# EAGLE board M0_v1.0 (EAGLE 9.6.2)
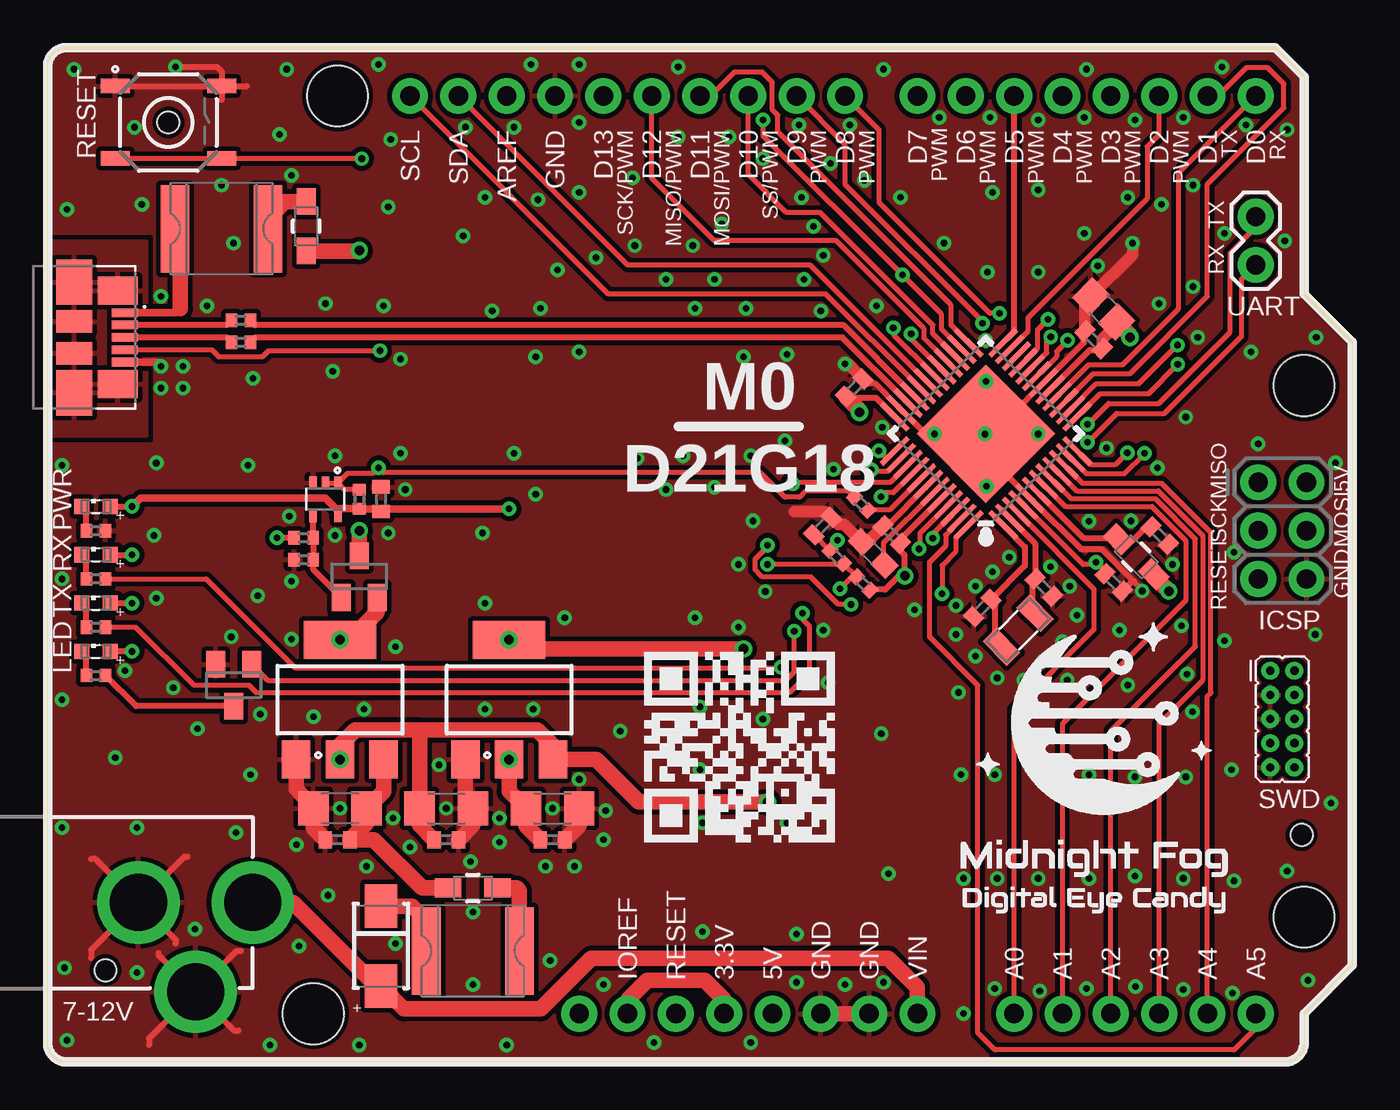
[diagram p0: board, top side]
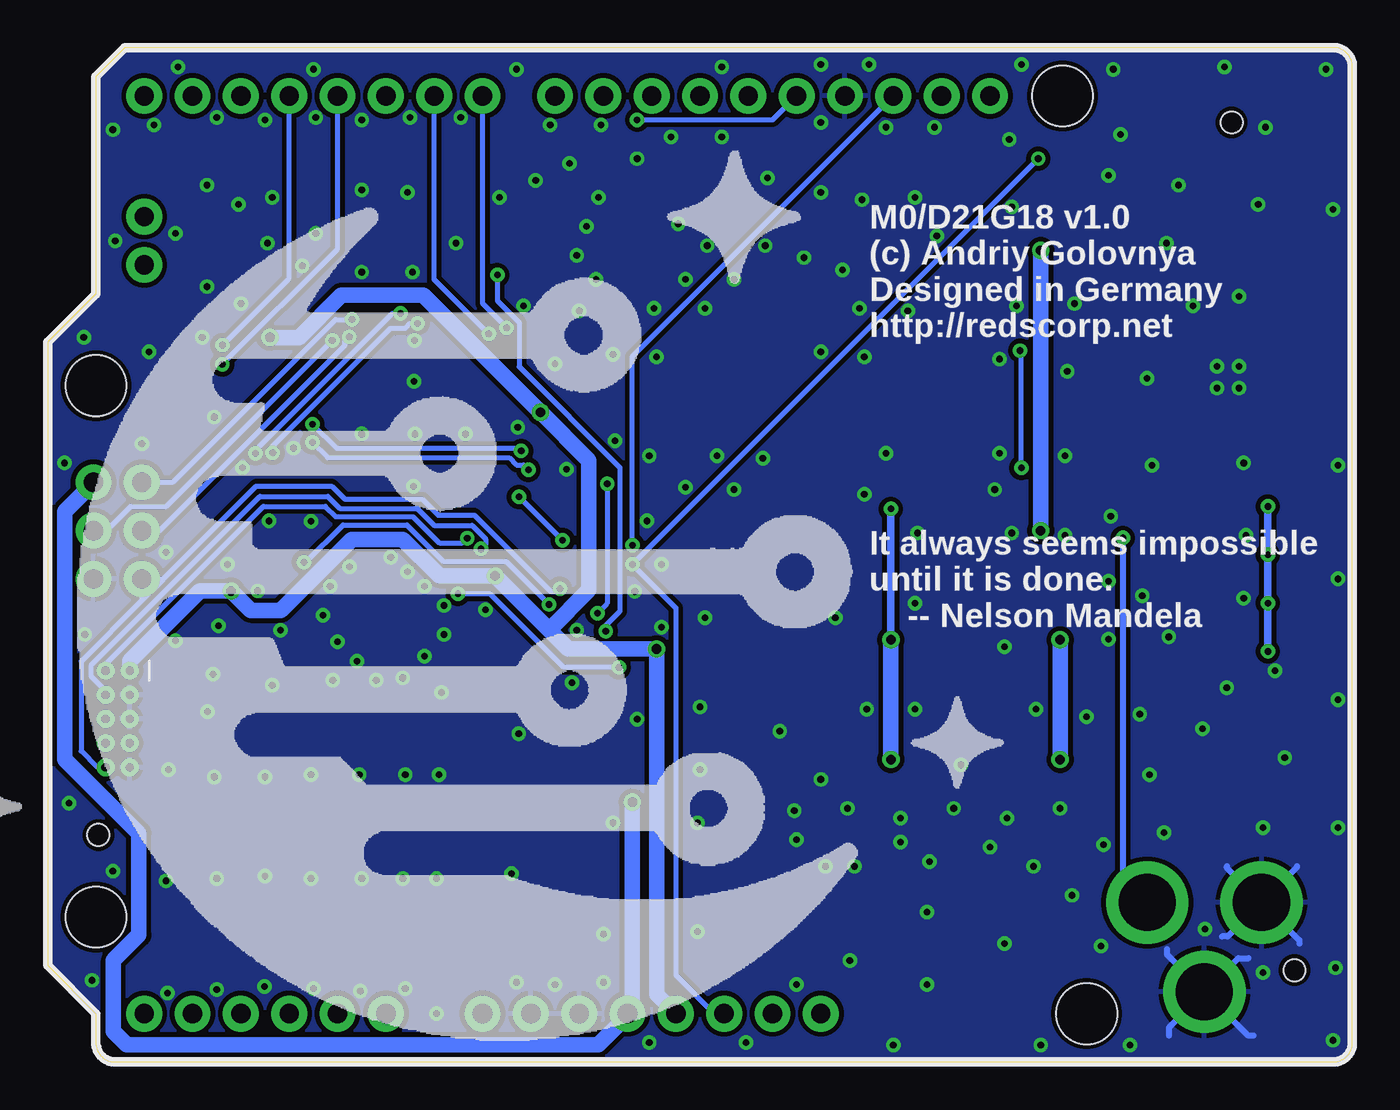
[diagram p1: board, bottom side, seen from below]

Size 68.58 x 53.34 mm. Coordinates in mm from the lower left corner, seen from the top.
Outline: 64.52,53.34 66.04,51.82 66.04,40.39 68.58,37.85 68.58,5.08 66.04,2.54 66.04,1 arc-90 65.04,0 1,0 arc-90 0,1 0,52.34 arc-90 1,53.34 64.52,53.34
Copper layers (1*16): Top 0.035mm / dielectric 1.5mm / Bottom 0.035mm
Design rules "default *": minimum track width 6mil, minimum drill 0.35mm, track to track 6mil, track to pad 6mil, pad to pad 6mil, via to via 6mil, smd to smd 6mil, copper to edge 10mil, drill to drill 6mil, minimum pad ring 10mil, minimum via ring 8mil, stop-mask expansion 4mil, vias tented up to drill 20mil, thermal gap 10mil
Net classes: 1 XUSB: width 0.305 mm; 2 USB: width 0.305 mm; 3 POWER: width 0.305 mm
Holes 3.2 mm at 13.97,2.54 15.24,50.8 66.04,7.62 66.04,35.56

## Footprints (pad centres in the part's own frame; a part is rotated, then mirrored left to right if it is on the bottom)
C1206 = smd 1.6 x 1.8: 1 -1.4,0; 2 1.4,0
C0402 = smd 0.7 x 0.9: 1 -0.65,0; 2 0.65,0
C0603 = smd 1.1 x 1: 1 -0.85,0; 2 0.85,0
C0805 = smd 1.3 x 1.5: 1 -0.95,0; 2 0.95,0
POWER_JACK_PTH = drill 2.997 pad 4.318: GND 0,7.7; GNDBREAK 4.7,10.7; PWR 0,13.7
MOLEX_47346-0001 = smd 0.45 x 1.38: 1 -1.3,2.66; 2 -0.65,2.66; 3 0,2.66; 4 0.65,2.66; 5 1.3,2.66 | smd 1.475 x 2.1: SH1 -2.462,2.3; SH2 2.462,2.3 | smd 2.375 x 1.9: SH3 -2.913,0; SH6 2.913,0 | smd 1.175 x 1.9: SH4 -0.838,0; SH5 0.838,0
1X10_NO_SILK = drill 1.016 pad 1.88: 1 0,0; 2 2.54,0; 3 5.08,0; 4 7.62,0; 5 10.16,0; 6 12.7,0; 7 15.24,0; 8 17.78,0; 9 20.32,0; 10 22.86,0
1X08_NO_SILK = drill 1.016 pad 1.88: 1 0,0; 2 2.54,0; 3 5.08,0; 4 7.62,0; 5 10.16,0; 6 12.7,0; 7 15.24,0; 8 17.78,0
2X3-NS = drill 1.016 pad 1.88: 1 -2.54,-1.27; 2 -2.54,1.27; 3 0,-1.27; 4 0,1.27; 5 2.54,-1.27; 6 2.54,1.27
1X06_NO_SILK = drill 1.016 pad 1.88: 1 0,0; 2 2.54,0; 3 5.08,0; 4 7.62,0; 5 10.16,0; 6 12.7,0
2X5_PTH_SILK_.05 = drill 0.432: 1 0,0; 2 0,1.27; 3 1.27,0; 4 1.27,1.27; 5 2.54,0; 6 2.54,1.27; 7 3.81,0; 8 3.81,1.27; 9 5.08,0; 10 5.08,1.27
1X02 = drill 1.016 pad 1.88: 1 0,0; 2 2.54,0
WE-TVSP_DO-214AC_UNIDIRECTIONAL = smd 2.3 x 1.7: 1 -2.1,0; 2 2.1,0
MF-SMDF050 = smd 1.5 x 4.6: 1 -2.45,0; 2 2.45,0
TOOLING-HOLE = hole 1.153: 0,0
SOT223 = smd 1.5 x 2: 1 -2.3,-3.15; 2 0,-3.15; 3 2.3,-3.15 | smd 3.8 x 2: 4 0,3.15
SC70-5 = smd 0.4 x 0.7: 1 -0.65,-0.85; 2 0,-0.85; 3 0.65,-0.85; 4 0.65,0.85; 5 -0.65,0.85
WE-CBA_0805(W=4) = smd 1.4 x 1: 1 -1.3,0; 2 1.3,0
SML0603 = smd 0.8 x 0.8: A 0.75,0; C -0.75,0
3.2X1.5 = smd 1 x 1.8: 1 -1.25,0; 2 1.25,0
R0402 = smd 0.6 x 0.7: 1 -0.5,0; 2 0.5,0
TACTILE_SWITCH_SMD_5.2MM = smd 1.524 x 0.762: 1 -2.794,1.905; 2 2.794,1.905; 3 -2.794,-1.905; 4 2.794,-1.905
SOT23 = smd 1 x 1.4: 1 -0.95,-1.1; 2 0.95,-1.1; 3 0,1.1
TQFP-48 = smd 1.5 x 0.28: 1 -4.25,2.75; 2 -4.25,2.25; 3 -4.25,1.75; 4 -4.25,1.25; 5 -4.25,0.75; 6 -4.25,0.25; 7 -4.25,-0.25; 8 -4.25,-0.75; 9 -4.25,-1.25; 10 -4.25,-1.75; 11 -4.25,-2.25; 12 -4.25,-2.75; 25 4.25,-2.75; 26 4.25,-2.25; 27 4.25,-1.75; 28 4.25,-1.25; 29 4.25,-0.75; 30 4.25,-0.25; 31 4.25,0.25; 32 4.25,0.75; 33 4.25,1.25; 34 4.25,1.75; 35 4.25,2.25; 36 4.25,2.75 | smd 0.28 x 1.5: 13 -2.75,-4.25; 14 -2.25,-4.25; 15 -1.75,-4.25; 16 -1.25,-4.25; 17 -0.75,-4.25; 18 -0.25,-4.25; 19 0.25,-4.25; 20 0.75,-4.25; 21 1.25,-4.25; 22 1.75,-4.25; 23 2.25,-4.25; 24 2.75,-4.25; 37 2.75,4.25; 38 2.25,4.25; 39 1.75,4.25; 40 1.25,4.25; 41 0.75,4.25; 42 0.25,4.25; 43 -0.25,4.25; 44 -0.75,4.25; 45 -1.25,4.25; 46 -1.75,4.25; 47 -2.25,4.25; 48 -2.75,4.25
QFN-48 = smd 0.7 x 0.25: 1 -3.4,2.75; 2 -3.4,2.25; 3 -3.4,1.75; 4 -3.4,1.25; 5 -3.4,0.75; 6 -3.4,0.25; 7 -3.4,-0.25; 8 -3.4,-0.75; 9 -3.4,-1.25; 10 -3.4,-1.75; 11 -3.4,-2.25; 12 -3.4,-2.75; 25 3.4,-2.75; 26 3.4,-2.25; 27 3.4,-1.75; 28 3.4,-1.25; 29 3.4,-0.75; 30 3.4,-0.25; 31 3.4,0.25; 32 3.4,0.75; 33 3.4,1.25; 34 3.4,1.75; 35 3.4,2.25; 36 3.4,2.75 | smd 0.25 x 0.7: 13 -2.75,-3.4; 14 -2.25,-3.4; 15 -1.75,-3.4; 16 -1.25,-3.4; 17 -0.75,-3.4; 18 -0.25,-3.4; 19 0.25,-3.4; 20 0.75,-3.4; 21 1.25,-3.4; 22 1.75,-3.4; 23 2.25,-3.4; 24 2.75,-3.4; 37 2.75,3.4; 38 2.25,3.4; 39 1.75,3.4; 40 1.25,3.4; 41 0.75,3.4; 42 0.25,3.4; 43 -0.25,3.4; 44 -0.75,3.4; 45 -1.25,3.4; 46 -1.75,3.4; 47 -2.25,3.4; 48 -2.75,3.4 | smd 5.15 x 5.15: EP 0,0

## Placement (x,y rotation side)
C1  47uF  [C1206]  15.37,13.34 180 top
C2  47uF  [C1206]  20.95,13.34 0 top
C3  47uF  [C1206]  26.54,13.34 0 top
C4  100nF  [C0402]  15.24,11.68 180 top
C5  100nF  [C0402]  20.95,11.68 0 top
C6  100nF  [C0402]  26.54,11.68 0 top
C7  1uF  [C0603]  43.39,26.75 135 top
C8  10nF  [C0402]  40.73,28.17 45 top
C9  100nF  [C0402]  58.46,27.68 315 top
C11  100nF  [C0402]  17.53,29.59 90 top
C12  12pF  [C0402]  49.14,23.87 45 top
C13  12pF  [C0402]  52.37,24.95 135 top
C14  100nF  [C0402]  42.4,35.46 45 top
C15  100nF  [C0402]  54.97,37.97 135 top
C16  100nF  [C0402]  44.38,27.73 135 top
C17  10uF  [C0805]  55.5,39.59 135 top
C19  100nF  [C0402]  56.04,25.22 315 top
CN1  POWER_JACK  [POWER_JACK_PTH]  -2.92,8.38 270 top
CN2  47346-0001  [MOLEX_47346-0001]  1.4,38.1 270 top
CN3  DIGITAL10  [1X10_NO_SILK]  19.05,50.8 0 top
CN4  DIGITAL8  [1X08_NO_SILK]  45.72,50.8 0 top
CN5  ICSP  [2X3-NS]  64.9,27.94 270 top
CN6  POWER8  [1X08_NO_SILK]  45.72,2.54 180 top
CN7  ANALOG6  [1X06_NO_SILK]  63.5,2.54 180 top
CN8  SWD  [2X5_PTH_SILK_.05]  64.26,20.57 270 top
CN9  UART  [1X02]  63.5,44.45 270 top
D1  M7  [WE-TVSP_DO-214AC_UNIDIRECTIONAL]  17.53,6.1 270 top
F1  1812L050/30PR  [MF-SMDF050]  22.35,5.84 0 top
F2  1812L050/30PR  [MF-SMDF050]  9.14,43.81 0 top
HOLE1  TOOLINGHOLE  [TOOLING-HOLE]  6.35,49.4 0 top
HOLE2  TOOLINGHOLE  [TOOLING-HOLE]  3.05,4.83 0 top
HOLE3  TOOLINGHOLE  [TOOLING-HOLE]  65.91,11.94 0 top
IC1  AMS1117-5.0  [SOT223]  15.37,19.05 0 top
IC2  AMS1117-3.3  [SOT223]  24.26,19.05 0 top
IC3  74LVC1G125DCK  [SC70-5]  14.61,29.59 180 top
L1  GZ2012D601TF  [WE-CBA_0805(W=4)]  22.35,9.14 180 top
L2  GZ2012D601TF  [WE-CBA_0805(W=4)]  13.59,43.94 270 top
L3  GZ2012D601TF  [WE-CBA_0805(W=4)]  57.22,26.57 315 top
LED1  GREEN  [SML0603]  2.54,29.21 0 top
LED2  BLUE  [SML0603]  2.54,26.67 0 top
LED3  BLUE  [SML0603]  2.54,24.13 0 top
LED4  YELLOW  [SML0603]  2.54,21.59 0 top
LOGO1  MFDECLOGO_SQ_10MM  [MFDEC_SQ_10MM]  46.99,7.37 0 top
LOGO2  MFDECLOGO_L_40MM  [MFDEC_L_40MM]  78.74,-2.54 0 bottom  (outside the outline)
LOGO3  RSNURL_QR_10MM  [RSNURL_QR_10MM]  31.37,11.56 0 top
Q2  32.768KHz  [3.2X1.5]  51.02,22.7 225 top
R1  22R  [R0402]  10.16,38.99 0 top
R2  22R  [R0402]  10.16,37.85 0 top
R3  330R  [R0402]  41.47,26.55 315 top
R4  100K  [R0402]  13.46,27.56 180 top
R5  47K  [R0402]  13.46,26.42 0 top
R6  330R  [R0402]  42.76,29.35 315 top
R7  470R  [R0402]  2.54,27.94 180 top
R8  470R  [R0402]  2.54,25.4 180 top
R9  470R  [R0402]  2.54,22.86 180 top
R10  470R  [R0402]  2.54,20.32 180 top
R11  100K  [R0402]  16.38,29.59 270 top
R12  10K  [R0402]  42.87,25.15 315 top
S1  RESET  [TACTILE_SWITCH_SMD_5.2MM]  6.35,49.4 0 top
T1  AO3401A  [SOT23]  16.38,25.53 0 top
T2  2N7002  [SOT23]  9.78,19.81 180 top
U1  ATSAMD21G18A-AU  [TQFP-48]  49.31,33.03 135 top
U2  ATSAMD21G18A-MU  [QFN-48]  49.31,33.03 135 top

## Library data of the parts
C1-C9 C11-C17 C19 = rcl; SPICEPREFIX: C
CN1 = SparkFun-Connectors; PROD_ID: CONN-08197
CN2 = SnapEDA-Library; MANUFACTURER: Molex
CN3 CN5 CN8 CN9 = SparkFun-Connectors
CN4 CN6 = SparkFun-Connectors; PROD_ID: CONN-08438
CN7 = SparkFun-Connectors; PROD_ID: CONN-08437
D1 = Wurth_EMC Components_WE-TVSP; DATASHEET-URL: -; IPEAK: 1.0A; MOUNT: SMT; PART-NUMBER: 824500252; PDISS: 400W; VBR: 294V; VCLAMP: 405V
F1 F2 = fuse
HOLE1-HOLE3 = _my_fiducia
IC1 IC2 = v-reg
IC3 = 74xx-little-us; SPICEPREFIX: J
L1-L3 = Wurth_Automotive_WE-CBA; DATASHEET-URL: https://www.we-online.com/catalog/datasheet/782853102.pdf; IR1: 1000mA; MOUNT: SMT; PART-NUMBER: 782853102; RDC-MAX: 0.3Ohm; TYPE: High Current; ZMAX: 1000Ohm
LED1-LED4 = led
LOGO1-LOGO3 = _my_logos
Q2 = crystal-geyer_V1_0
R1-R12 = rcl; SPICEPREFIX: R
S1 = SparkFun-Switches; PROD_ID: SWCH-08247; SF_SKU: COM-08720
T1 = Transistor; CATEGORY: Transistor; SUB-CATEGORY: MOSFET; TYPE: P-Channel
T2 = Transistor; CATEGORY: Transistor; SUB-CATEGORY: MOSFET; TYPE: N-Channel
U1 U2 = SparkFun-IC-Microcontroller; PROD_ID: IC-13064

## Nets
3.3V [POWER]: C3.1 C6.1 C11.1 C14.1 C15.1 C16.1 C17.1 CN6.5 CN6.7 CN8.1 IC2.4 IC3.5 L3.2 LED1.A LED2.A LED3.A LED4.A R11.2 R12.2 U1.17 U1.36 U1.44 U2.17 U2.36 U2.44
5V [POWER]: C2.1 C5.1 CN5.2 CN6.4 IC1.4 IC2.3 T1.2
A0: CN7.6 U1.3 U2.3
A1: CN7.5 U1.7 U2.7
A2: CN7.4 U1.8 U2.8
A3: CN7.3 U1.9 U2.9
A4: CN7.2 U1.10 U2.10
A5: CN7.1 U1.47 U2.47
AREF: C19.1 CN3.3 U1.4 U2.4
D0_RX: CN4.8 U1.16 U2.16
D1_TX: CN4.7 U1.15 U2.15
D2: CN4.6 U1.23 U2.23
D3_PWM: CN4.5 U1.14 U2.14
D4: CN4.4 U1.13 U2.13
D5_PWM: CN4.3 U1.24 U2.24
D6_PWM: CN4.2 U1.29 U2.29
D7: CN4.1 U1.30 U2.30
D8: CN3.10 U1.11 U2.11
D9_PWM: CN3.9 U1.12 U2.12
D10_SS: CN3.8 U1.27 U2.27
D11_MOSI: CN3.7 U1.25 U2.25
D12_MISO: CN3.6 U1.28 U2.28
D13_SCK: CN3.5 T2.1 U1.26 U2.26
GND [POWER]: C1.2 C2.2 C3.2 C4.2 C5.2 C6.2 C7.2 C8.2 C9.2 C11.2 C12.1 C13.1 C14.2 C15.2 C16.2 C17.2 C19.2 CN1.GND CN1.GNDBREAK CN2.5 CN3.4 CN5.6 CN6.2 CN6.3 CN8.3 CN8.5 CN8.9 IC1.1 IC2.1 IC3.3 R5.1 R7.1 S1.1 T2.2 U1.5 U1.18 U1.35 U1.42 U2.5 U2.18 U2.35 U2.42
MCU_OSC32_IN: C12.2 Q2.2 U1.1 U2.1
MCU_OSC32_OUT: C13.2 Q2.1 U1.2 U2.2
MCU_RESET: C8.1 R3.1 U1.40 U2.40
N$2: D1.1 F1.1
N$3: F1.2 L1.1
N$4: F2.2 L2.1
N$7: LED1.C R7.2
N$9: LED3.C R9.2
N$10: LED2.C R8.2
N$11: LED4.C R10.2
N$12: IC3.4 R4.1 R5.2 T1.1
N$13: R10.1 T2.3
N$14: C1.1 C4.1 IC1.3 L1.2
RESET: CN5.5 CN6.6 CN8.10 R3.2 R12.1 S1.3
RX_LED: R8.1 U1.48 U2.48
SCL: CN3.1 U1.32 U2.32
SDA: CN3.2 U1.31 U2.31
SPI_MISO: CN5.1 U1.21 U2.21
SPI_MOSI: CN5.4 U1.19 U2.19
SPI_SCK: CN5.3 U1.20 U2.20
SWDCLK: CN8.4 U1.45 U2.45
SWDIO: CN8.2 U1.46 U2.46
TX_LED: R9.1 U1.39 U2.39
UART_RX: CN9.2 U1.38 U2.38
UART_TX: CN9.1 U1.37 U2.37
USB_D_M [USB]: R1.2 U1.33 U2.33
USB_D_P [USB]: R2.2 U1.34 U2.34
USB_EN: R6.2 U1.41 U2.41
USB_SHIELD: CN2.SH1 CN2.SH2 CN2.SH3 CN2.SH4 CN2.SH5 CN2.SH6
VDDANA: C9.1 L3.1 U1.6 U2.6
VDDCORE: C7.1 U1.43 U2.43
VIN [POWER]: CN1.PWR CN6.1 D1.2 R4.2
VUSB [POWER]: L2.2 T1.3
XUSB [POWER]: CN2.1 F2.1
XUSB_D_M [XUSB]: CN2.2 R1.1
XUSB_D_P [XUSB]: CN2.3 R2.1
XUSB_EN: CN2.4 IC3.1 IC3.2 R6.1 R11.1

## Tracks (layer width: path | path; a pad name or v marks a point on that pad's centre or on a via)
3.3V  (via drill 0.35, 0.5)
  Top 0.305: LED1.A v4.45,29.21 | v4.45,21.59 LED4.A | LED3.A v4.45,24.13 | LED2.A v4.45,26.67 | C15.1 55.35,37.43 54.78,37.43 U1.17 U2.17 | C14.1 42.02,34.92 43.54,34.92 | 44.9,25.72 45.04,25.86 45.04,26.67 44.84,26.87 C16.1 44.84,27.49 U1.44 U2.44 | 44.9,25.72 44.02,24.84 43.27,24.84 R12.2 | v45.06,25.56 44.9,25.72 | 44.9,25.72 | U2.36 U1.36 43.54,34.92 | 43.54,34.92
  Top 0.406: v4.45,29.21 4.88,29.65 14.6,29.65 15.26,29 | v24.26,29.08 24.24,29.07 17.65,29.07 C11.1 17.4,29.07 16.41,29.07 R11.2 15.35,29.09 15.26,29 | 15.26,29 IC3.5
  Top 0.61: C15.1 55.43,38.02 56.18,38.76 C17.1
  Top 0.813: v36.58,21.72 24.74,21.72 IC2.4 | v24.26,15.91 24.26,14.22 C3.1 25.14,12.43 C6.1 | CN6.5 35.56,3.26 34.53,4.29 31.51,4.29 30.48,3.26 CN6.7 | v58.93,24.77 58.14,25.56 L3.2 | C14.1 42.67,34.27 v42.67,34.16 | C17.1 56.9,38.2 v56.9,38.1
  Bottom 0.406: v4.45,29.21 v4.45,26.67 v4.45,24.13 v4.45,21.59 | IC2.4 v24.26,29.08
  Bottom 0.813: IC2.4 v24.26,15.91 | CN6.5 36.58,3.56 v36.58,21.72 41.22,21.72 42.23,22.73 | CN8.1 64.26,21.08 60.58,24.77 v58.93,24.77 57.91,23.75 56.32,23.75 52.59,27.48 49.9,27.48 47.98,25.56 v45.06,25.56 42.23,22.73 | 42.23,22.73 40.13,24.82 40.13,31.62 v42.67,34.16 v42.68,34.16 48.82,40.31 53.15,40.31 55.36,38.1 v56.9,38.1
  other vias: 24.26,22.2
5V  (via drill 0.5)
  Top 0.305: IC1.4 14.73,22.2 13.97,22.96
  Top 0.813: T1.2 17.33,23.66 15.87,22.2 IC1.4 | 19.55,17.46 C2.1 19.55,12.43 C5.1 | 19.55,17.46 25.75,17.46 26.56,16.65 IC2.3 28.84,15.9 31.08,13.66 v37.85,13.66 | 19.55,17.46 16.18,17.46 15.37,16.65 v15.37,15.91
  Bottom 0.813: IC1.4 v15.37,15.91 | v37.85,13.66 37.85,2.79 CN6.4 38.1,2.45 39.64,0.91 64.41,0.91 65.13,1.63 65.13,5.34 63.78,6.68 63.78,12.03 67.67,15.92 67.67,28.94 66.17,30.44 CN5.2
  other vias: 15.37,22.2
A0
  Top 0.254: CN7.6 50.8,18.54 54.99,22.73 54.99,24.88 U1.3 U2.3 | U2.3
A1
  Top 0.254: CN7.5 53.34,17.78 59.82,24.26 59.82,27.43 58.04,29.21 53.49,29.21 U1.7 U2.7
A2
  Top 0.254: CN7.4 55.88,17.4 60.33,21.84 60.33,27.5 58.21,29.62 53.79,29.62 U1.8 U2.8
A3
  Top 0.254: CN7.3 58.42,17.78 60.73,20.09 60.73,27.67 58.38,30.02 54.09,30.02 U1.9 U2.9
A4
  Top 0.254: CN7.2 60.96,19.24 61.14,19.41 61.14,27.84 58.54,30.43 54.39,30.43 U1.10 U2.10 | U2.10
A5
  Top 0.254: CN7.1 63.5,1.78 62.36,0.64 49.78,0.64 48.9,1.52 48.9,19.81 46.35,22.35 46.35,26.29 47.19,27.13 47.19,27.71 47.9,28.42 U1.47 U2.47
AREF  (via drill 0.35)
  Top 0.254: v42.22,24.06 41.56,24.06 40.11,25.5 37.57,25.5 37.19,25.89 37.19,26.43 37.85,27.09 v37.85,27.18 | U2.4 U1.4 54.42,26.15 54.98,26.15 v55.11,26.28 55.58,25.81 C19.1
  Bottom 0.254: v42.22,24.06 44.48,26.32 47.77,26.32 49.7,28.24 53.05,28.24 55.01,26.28 v55.11,26.28 | v37.85,27.18 37.85,37.08 CN3.3
D0_RX
  Top 0.254: CN4.8 59.44,46.74 59.44,39.6 56.51,36.67 54.72,36.67 U1.16 U2.16
D1_TX
  Top 0.254: CN4.7 61.52,50.8 62.99,52.27 64.13,52.27 64.97,51.43 64.97,50.17 60.96,46.16 60.96,40.26 56.9,36.2 54.95,36.2 U1.15 | U2.15 U1.15 | U1.15
D2
  Top 0.254: CN4.6 58.42,48.77 57.78,48.13 57.78,45.38 51.53,39.13 51.53,38.43 U1.23 U2.23
D3_PWM  (via drill 0.35)
  Top 0.254: v59.38,37.69 57.35,35.66 55.13,35.66 U1.14 U2.14
  Bottom 0.254: v59.38,37.69 55.88,41.2 CN4.5
D4  (via drill 0.35)
  Top 0.254: v59.4,36.68 57.85,35.13 55.3,35.13 U1.13 U2.13
  Bottom 0.254: v59.4,36.68 53.34,42.74 CN4.4
D5_PWM
  Top 0.254: U2.24 U1.24 50.8,38.41
  Top 0.305: 50.8,38.41 CN4.3
D6_PWM  (via drill 0.35)
  Top 0.254: v45.39,38.28 45.39,38.02 U1.29 U2.29
  Bottom 0.254: v45.39,38.28 48.26,41.15 CN4.2
D7  (via drill 0.35)
  Top 0.254: U2.30 U1.30 44.45,38.25 v44.45,38.61
  Bottom 0.254: v44.45,38.61 45.72,39.88 CN4.1
D8  (via drill 0.35)
  Top 0.254: v57.66,32 56.59,30.94 54.59,30.94 U1.11 U2.11 | v50.04,39.37 49.53,39.37 43.69,45.21 43.69,49.02 CN3.10
  Bottom 0.254: v57.66,32 v57.66,32.01 57.66,32.15 50.44,39.37 v50.04,39.37
D9_PWM  (via drill 0.35)
  Top 0.254: v56.75,32.03 56.14,31.42 54.82,31.42 U1.12 U2.12 | v49.13,38.84 49.13,38.94 41.91,46.16 41.91,48.26 CN3.9
  Bottom 0.254: v56.75,32.03 56.75,32.38 50.55,38.59 49.77,38.59 49.51,38.84 v49.13,38.84
D10_SS
  Top 0.254: CN3.8 36.83,46.67 38.83,44.67 40.61,44.67 46.53,38.75 46.53,38.29 U1.27 | U1.27 | U2.27 U1.27
D11_MOSI
  Top 0.254: U2.25 U1.25 47.49,38.74 47.49,39.79 38.38,48.91 38.38,49.78 38.1,50.06 38.1,51.51 37.56,52.05 36.1,52.05 34.85,50.8 CN3.7
D12_MISO
  Top 0.254: CN3.6 31.75,46.48 35.05,43.18 41.45,43.18 46.07,38.56 46.07,38.04 U1.28 U2.28
D13_SCK  (via drill 0.35)
  Top 0.254: T2.1 11.57,20.07 38.8,20.07 39.24,20.51 v39.24,22.65 | v37.6,49.54 37.6,48.71 44.89,41.42 44.9,41.42 v44.94,41.38 v44.94,41.37 46.99,39.32 46.99,38.54 U1.26 U2.26
  Bottom 0.254: v37.6,49.54 30.47,49.54 CN3.5 | v44.94,41.38 44.94,40.02 43.79,38.88 43.79,36.55 38.51,31.27 38.51,23.7 39.24,22.96 v39.24,22.65
GND  (via drill 0.35)
  Top 0.305: S1.1 10.49,51.31 | v6.73,52.32 8.89,52.32 9.14,52.07 9.14,50.6 | CN1.GNDBREAK 5.84,5.62 5.84,5.71 | CN1.GNDBREAK 9.81,1.65 10.03,1.65 | CN1.GNDBREAK 9.94,5.84 10.16,5.84 | CN1.GNDBREAK 5.33,1.24 5.33,0.89 | CN1.GND 2.49,10.67 2.29,10.67 | CN1.GND 7.19,10.79 7.37,10.79 | CN1.GND 2.29,5.89 2.29,5.46 | CN1.GND 6.73,6.43 6.73,6.22 | C16.2 44.12,28.19 U1.42 U2.42 | 43.07,27.35 C7.2 | C15.2 54.46,38.38 54.46,37.82 U1.18 U2.18 51.08,34.45 51.08,34.01 v52.07,33.02 | U2.5 U1.5 | v46.61,33.02 46.15,33.02 U2.35 U1.35 43.5,35.66 43.11,35.66 C14.2 | U1.5 50.39,30.89 49.85,30.89 49.35,30.39 v49.35,30.28 | 57.08,25.27 55.39,26.96 54.32,26.96 U1.5 | v57.53,24.77 57.53,24.84 57.1,25.27 57.08,25.27 | C19.2 57.01,25.27 57.08,25.27
  Top 0.406: CN2.5 5.75,36.8 v5.97,36.58
  Top 0.61: C16.2 43.07,27.35 | C15.2 54.51,39.95 54.58,40.02 54.59,40.02 C17.2 57.02,42.45 v57.02,43.05 | C14.2 42.07,36.7 v41.91,36.7 | C7.2 41.86,28.27 41.55,28.27 C8.2 40.86,28.96 39.24,28.96
  Top 0.813: CN6.2 CN6.3 | IC1.1 13.07,14.36 14,13.37 | C3.2 27.94,12.43 C6.2 | C1.2 13.97,12.31 C4.2 | IC2.1 21.96,13.73 C2.2 22.36,12.43 C5.2
  Bottom 0.305: CN1.GND 6.6,10.21 6.6,10.29 | CN1.GND 2.92,10.24 2.92,10.29 | CN1.GND 2.79,6.4 2.79,6.22 | CN1.GND 6.56,6.6 6.86,6.6 | CN1.GNDBREAK 6,5.46 5.46,5.46 | CN1.GNDBREAK 9.74,5.65 9.74,5.93 | CN1.GNDBREAK 5.49,1.4 5.21,1.4 | CN1.GNDBREAK 9.65,1.81 9.65,1.4
  other vias: 25.53,18.54 34.29,15.37 8.38,39.75 9.78,43.05 9.14,46.1 4.06,20.57 5.71,31.5 5.97,35.43 12.19,48.77 4.57,49.15 1.4,52.2 22.35,4.06 22.35,7.87 19.05,11.3 18.16,12.83 18.29,6.22 26.42,5.33 31.88,1.02 29.21,4.06 23.75,12.83 23.75,11.56 26.16,10.29 39.37,4.19 43.94,4.19 48.13,2.54 0.76,12.32 1.02,1.14 11.68,0.89 16.38,0.89 24.13,0.89 0.89,4.95 4.7,12.32 0.76,31.37 0.76,25.4 3.56,16 0.76,19.05 25.4,52.45 27.94,52.45 17.4,52.45 43.94,52.2 4.95,45.09 1.02,44.83 7.11,36.58 7.11,35.43 5.97,40.26 14.73,8.76 13.97,18.16 13.08,11.43 12.57,52.2 13.21,6.1 7.75,6.99 4.7,4.7 41.91,4.06 20.57,15.62 20.95,13.34 26.54,13.34 15.37,13.34 16.76,10.29 12.83,46.61 22.99,18.54 16.64,18.54 29.21,11.68 22.23,10.54 29.34,13.21 27.69,10.29 34.29,18.67 18.54,36.96 30.99,31.75 17.65,39.75 17.91,44.96 18.03,48.51 14.61,39.88 10.79,35.94 10.54,31.37 14.99,36.32 18.8,30.1 34.04,23.37 22.86,27.81 17.91,27.81 27.18,23.37 25.65,29.84 5.59,27.69 15.11,27.69 11.05,24.51 9.65,22.35 11.18,18.29 9.91,12.06 10.67,15.11 7.87,17.53 39.37,6.73 44.2,9.91 34.42,12.57 34.42,6.86 37.59,18.03 12.83,25.27 30.1,17.4 27.94,14.86 12.7,28.7 15.11,31.88 5.71,24.38 6.6,19.68 18.29,21.84 22.99,24.13 12.83,22.23 27.94,49.4 52.7,26.04 53.72,25.02 54.1,23.5 53.34,22.1 52.32,21.08 51.31,20.07 49.91,20.19 48.77,21.34 47.75,22.48 47.75,24 48.77,25.02 49.66,25.78 59.13,26.16 56.95,28.45 54.74,28.42 49.33,35.79 49.28,33.02 50.55,26.54 44.83,45.47 42.93,46.35 39.62,45.47 47.12,43.05 49.4,41.53 52.07,41.53 54.48,43.56 55.19,41.86 56.77,45.47 58.42,39.88 60.2,40.77 60.45,38.1 62.99,49.28 33.15,52.32 40.26,43.94 43.56,39.75 40.64,39.5 38.76,32.66 41.3,31.17 43.87,33.38 58.34,31.24 62.36,26.8 59.59,22.94 59.89,20.4 60.17,18.41 56.34,22.71 66.62,22.48 61.85,22.15 67.46,13.61 66.24,4.29 62.28,3.63 59.69,3.81 57.18,3.96 54.61,3.86 52.15,3.73 49.78,3.86 45.57,23.77 40.77,22.71 36.32,22.86 37.72,24.74 35.05,30.23 37.08,28.45 24.51,49.15 30.86,42.93 33.91,42.93 65.15,10.03 49.91,9.65 52.07,9.65 54.74,9.65 57.15,9.78 59.69,9.65 62.36,9.53 59.82,33.91 67.69,31.5 65.02,43.18 65.15,49.02 61.85,43.56 59.69,49.66 57.15,49.53 54.48,49.66 52.07,49.53 49.53,49.66 46.86,49.66 33.15,48.64 35.81,48.64 27.94,45.72 36.7,39.62 34.04,39.62 36.58,37.08 38.86,37.21 27.94,37.34 25.91,39.62 23.37,39.5 25.65,37.08 22.99,45.47 33.4,31.88 32.51,30.1 48.13,9.65 47.88,19.43 41.02,19.94 55.65,32.28 37.59,47.5 36.32,26.16 18.54,32 24.51,32 66.67,38.1 63.63,32.51 63.25,37.34 49.3,37.95 38.86,12.57 36.96,31.88 28.83,42.29 21.97,49.15 25.78,45.34 39.75,41.15 35.05,41.15 32.51,41.15 26.8,41.66 35.43,44.07 40.77,42.42 30.73,46.48 41.15,47.24 39.5,49.28 42.16,49.28 59.82,14.99 57.15,14.99 54.74,15.11 52.2,15.11 49.78,15.11 43.81,17.27 49.66,45.72 52.07,45.85 58.55,45.09 60.2,46.1 48.01,15.11 62.23,15.37 61.72,52.32 21.84,43.43 56.77,19.81 36.96,1.02 54.61,52.2 53.59,20.07
  pour Top (isolate 0.254, rank 2): 0,0 0,55.88 72.52,55.88 72.52,0
  pour Bottom (isolate 0.254, rank 2): 0,0 0,58.93 75.82,58.93 75.82,0
MCU_OSC32_IN
  Top 0.305: U2.1 U1.1 51.37,27.09 51.37,26.1 C12.2 49.78,24.14 49.78,22.17 Q2.2
MCU_OSC32_OUT
  Top 0.305: U2.2 U1.2 51.91,27.26 C13.2 51.76,25.26 51.76,23.74 Q2.1
MCU_RESET  (via drill 0.35)
  Top 0.254: v41.51,27.43 41.51,27.3 R3.1 40.31,27.71 C8.1 | v43.8,29.71 44.03,29.94 44.46,29.94 U1.40 U2.40
  Bottom 0.254: v41.51,27.43 v43.8,29.71
N$2
  Top 0.813: D1.1 19.18,8.2 19.9,7.47 F1.1
N$3
  Top 0.813: L1.1 24.67,9.14 24.8,9.01 F1.2
N$4
  Top 0.813: L2.1 12.48,45.24 11.59,44.36 F2.2
N$7
  Top 0.305: R7.2 2.04,28.96 LED1.C
N$9
  Top 0.305: R9.2 2.04,23.88 LED3.C
N$10
  Top 0.305: R8.2 2.04,26.42 LED2.C
N$11
  Top 0.305: R10.2 2.04,21.34 LED4.C
N$12
  Top 0.305: IC3.4 R4.1 R5.2 13.97,26.41 13.97,25.89 T1.1
N$13
  Top 0.305: T2.3 4.65,18.71 R10.1
N$14
  Top 0.813: IC1.3 17.67,14.23 C1.1 16.77,12.56 C4.1 17.14,11.68 19.68,9.14 L1.2
RESET  (via drill 0.35)
  Top 0.254: v37.85,26.16 41.79,26.16 R3.2 R12.1 42.27,25.5 v41.66,24.89 | v16.51,47.5 S1.3
  Bottom 0.254: CN6.6 33.53,2.54 35.56,4.57 35.56,23.88 v37.85,26.16 v16.51,47.5 | 63.63,24.26 CN5.5 62.49,25.4 | 63.63,24.26 66.81,21.07 66.81,16.35 65.96,15.49 CN8.10 | 62.49,25.4 57.62,30.28 53.65,30.28 52.96,29.59 48.9,29.59 48.06,28.75 46.15,28.75 42.14,24.74 41.81,24.74 v41.66,24.89 | 63.63,24.26 62.48,25.4 62.49,25.4
RX_LED  (via drill 0.35)
  Top 0.254: R8.1 8.34,25.4 13.01,20.72 38.55,20.72 v38.55,20.75 | v47.01,24.62 47.01,26.12 47.73,26.83 47.73,27.55 U1.48 U2.48
  Bottom 0.254: v47.01,24.62 45.32,24.62 41.45,20.75 v38.55,20.75
SCL
  Top 0.254: CN3.1 29.46,40.39 40.9,40.39 U1.32 U2.32
SDA
  Top 0.254: CN3.2 30.48,41.91 40.08,41.91 U1.31 U2.31
SPI_MISO  (via drill 0.35)
  Top 0.254: v52.58,39.04 52.04,38.5 52.04,37.52 U1.21 U2.21
  Bottom 0.254: CN5.1 62.01,30.48 53.44,39.05 v52.58,39.05 v52.58,39.04
SPI_MOSI  (via drill 0.35)
  Top 0.254: v53.61,37.94 53.03,37.36 53.03,37.1 U1.19 U2.19
  Bottom 0.254: CN5.4 65.48,27.94 64.21,29.21 62.35,29.21 v53.61,37.94
SPI_SCK  (via drill 0.35)
  Top 0.254: v52.72,38.13 52.52,37.93 52.52,37.3 U1.20 U2.20
  Bottom 0.254: v52.72,38.13 52.96,37.9 52.96,37.67 62.69,27.94 CN5.3
SWDCLK  (via drill 0.35)
  Top 0.254: v45.79,26.98 45.84,27.03 45.84,27.79 U1.45 U2.45
  Bottom 0.254: v45.79,26.98 45.56,27.21 45.56,27.51 46.27,28.22 48.26,28.22 49.15,29.11 53.21,29.11 53.85,29.74 57.42,29.74 66.28,20.88 66.28,20.26 65.53,19.51 CN8.4
SWDIO  (via drill 0.35)
  Top 0.254: v46.52,27.54 46.52,27.77 U1.46 | U2.46 U1.46 | U1.46
  Bottom 0.254: CN8.2 65.53,20.92 57.24,29.21 53.98,29.21 53.44,28.68 49.38,28.68 47.99,27.29 46.78,27.29 v46.52,27.54
TX_LED  (via drill 0.35)
  Top 0.254: R9.1 4.65,22.86 7.7,19.81 10.59,19.81 10.99,19.41 38.97,19.41 40.03,20.47 40.03,22.93 39.68,23.28 v39.68,23.6 | v39.17,30.4 39.24,30.48 44.29,30.48 U1.39 | U2.39 U1.39 | U1.39
  Bottom 0.254: v39.68,23.6 39.17,24.11 v39.17,30.4
UART_RX  (via drill 0.35)
  Top 0.254: v43.31,31.14 43.31,31.06 44.16,31.06 44.63,31.53 44.63,31.55 44.79,31.71 44.81,31.71 U2.38 U1.38 | v54.66,32.58 56.18,34.09 58.7,34.09 62.74,38.13 62.74,41.15 CN9.2
  Bottom 0.254: v43.31,31.14 43.56,31.39 43.94,31.39 44.32,31.77 53.86,31.77 v54.66,32.58
UART_TX  (via drill 0.35)
  Top 0.254: v43.69,32.13 44.1,31.72 44.11,31.72 U1.37 U2.37 | CN9.1 63.5,43.89 62.15,42.54 62.15,38.38 58.4,34.63 55.76,34.63 v54.66,33.53
  Bottom 0.254: v43.69,32.13 43.81,32.26 53.39,32.26 v54.66,33.53
USB_D_M
  Top 0.305: R1.2 10.91,38.73 41.84,38.73 U1.33 U2.33
USB_D_P
  Top 0.305: R2.2 10.91,38.1 41.77,38.1 U1.34 U2.34 | U2.34
USB_EN
  Top 0.254: R6.2 43.17,29.05 44.28,29.05 U1.41 U2.41
USB_SHIELD
  pour Top (isolate 0.254): 5.21,39.88 3.05,39.88 3.05,36.32 5.21,36.32 5.21,32.89 0,32.89 0,43.18 5.21,43.18
VDDANA
  Top 0.254: U2.6 U1.6
  Top 0.305: C9.1 57.73,28.14 57.08,27.48 L3.1 56.23,27.55 54.44,27.55 U1.6
VDDCORE
  Top 0.254: C7.1 43.93,26.21 43.93,27.29 U1.43 U2.43
VIN  (via drill 0.35)
  Top 0.305: R4.2 v12.06,27.56
  Top 0.813: CN1.PWR 12.89,8.38 17.27,4 D1.2 18.73,2.79 25.91,2.79 28.57,5.46 44.2,5.46 45.72,3.94 CN6.1
  Bottom 0.305: CN1.PWR 12.06,9.67 v12.06,27.56
VUSB  (via drill 0.5)
  Top 0.813: L2.2 16.35,42.64 v16.38,42.67 | v16.38,27.94 T1.3
  Bottom 0.813: v16.38,42.67 v16.38,27.94
XUSB
  Top 0.406: CN2.1 6.76,39.4 6.99,39.62
  Top 0.813: 6.99,39.62 6.99,43.52 F2.1
XUSB_D_M
  Top 0.305: CN2.2 9.42,38.75 R1.1
XUSB_D_P
  Top 0.305: CN2.3 9.41,38.1 R2.1
XUSB_EN  (via drill 0.35)
  Top 0.254: CN2.4 8.63,37.45 8.99,37.09 11.31,37.09 11.62,37.41 v17.47,37.41 | IC3.1 15.76,30.95 17.11,30.95 v17.4,31.24 17.65,30.99 37.47,30.99 38.75,29.7 39.52,29.7 39.83,30.01 42.1,30.01 R6.1 | R11.1 15.61,30.09 IC3.1 | IC3.2 IC3.1
  Bottom 0.254: v17.4,31.24 17.4,37.34 v17.47,37.41

## Text on the board
tPlace: SCL | SDA | AREF | GND | D13 | SCK/PWM | D12 | MISO/PWM | D11 | MOSI/PWM | D10 | SS/PWM | D9 | PWM | D8 | PWM | D7 | PWM | D6 | PWM | D5 | PWM | D4 | PWM | D3 | PWM | D2 | PWM | D1 | TX | D0 | RX | RESET | TX | RX | UART | M0 | D21G18 | MISO | 5V | PWR | + | SCK | MOSI | RX | + | RESET | GND | TX | + | ICSP | + | LED | SWD | IOREF | RESET | 3.3V | 5V | GND | GND | VIN | A0 | A1 | A2 | A3 | A4 | A5 | + | 7-12V
bPlace: M0/D21G18 v1.0 / (c) Andriy Golovnya / Designed in Germany / http://redscorp.net | It always seems impossible / until it is done. / -- Nelson Mandela